# Altium PCB VisitCardPCB.PcbDoc (part 1 of 3)
Units mm, origin at the board's own origin, x right, y up, seen from the top; angles counter-clockwise.
Board outline 85 x 55 mm, 2 copper layers (Top, Bottom); 50 components, 47 nets, 148 pads, 42 vias.
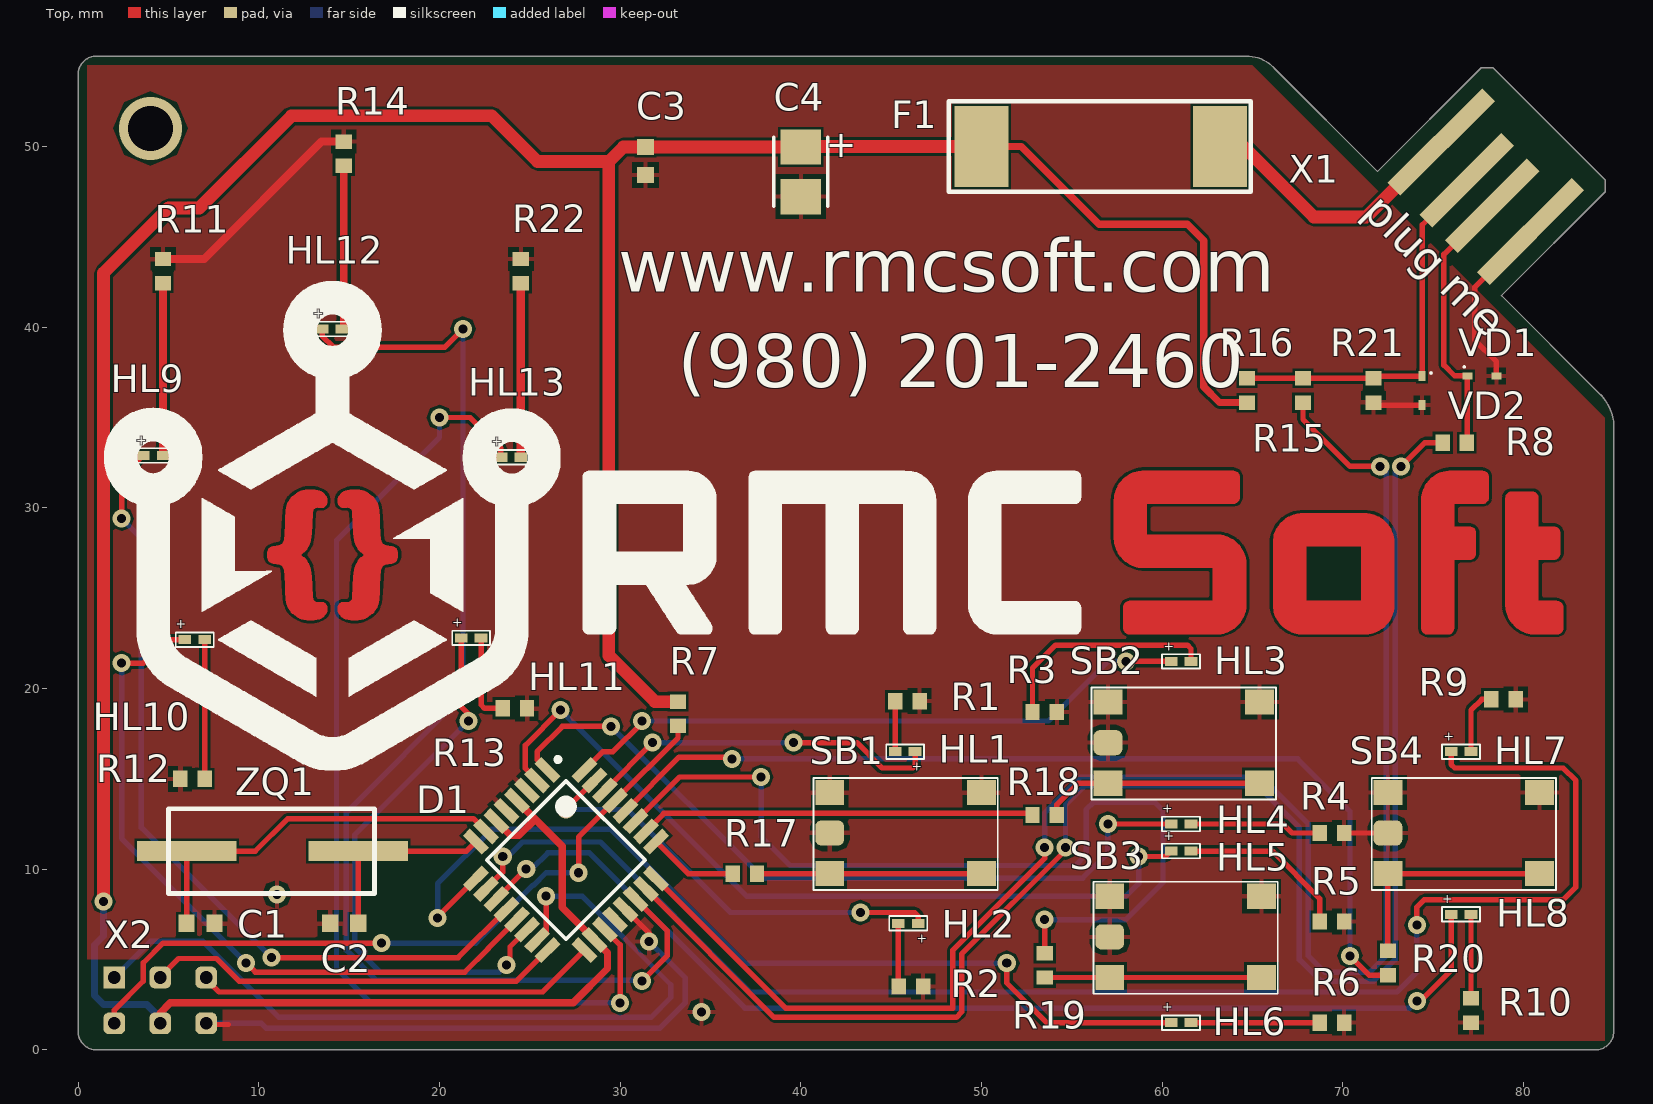
[diagram p0: Top view]
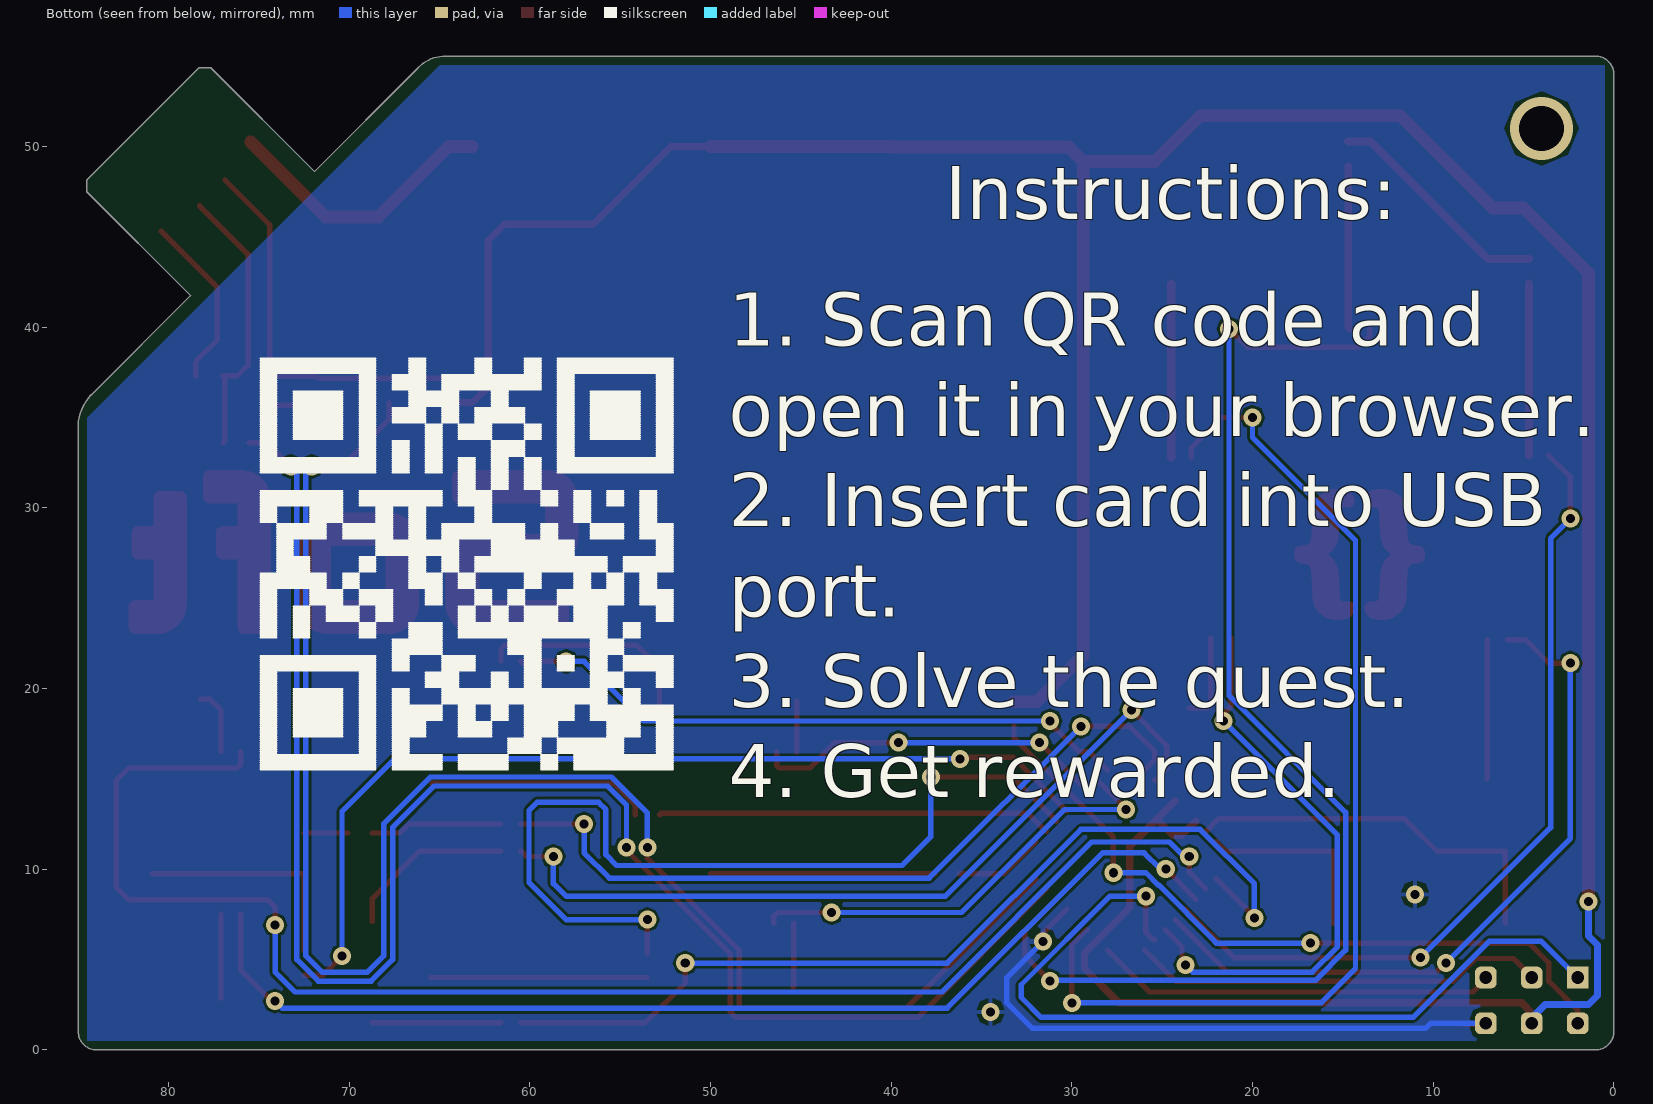
[diagram p1: Bottom view, seen from below]
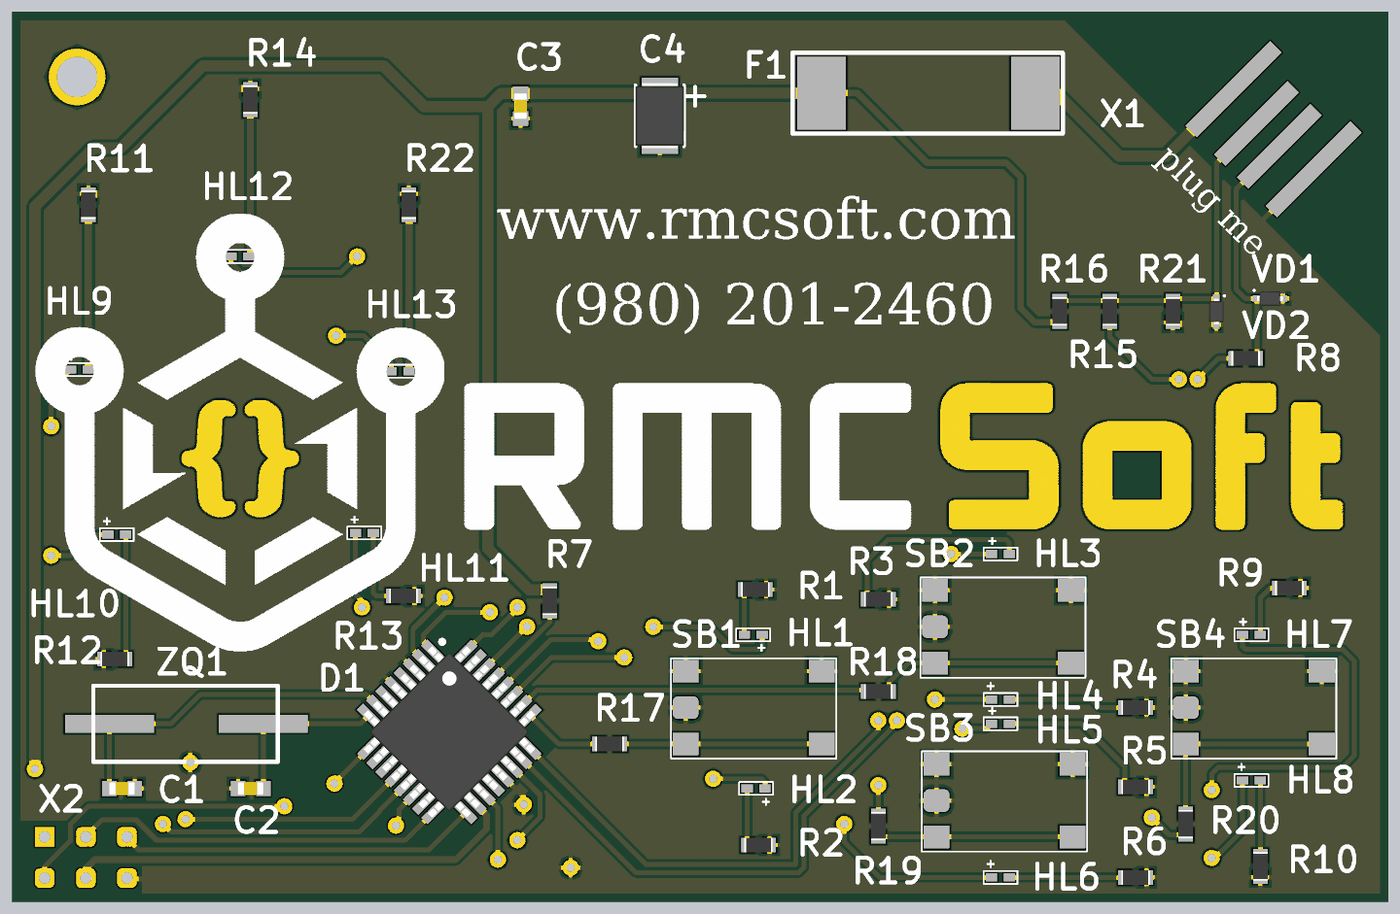
[diagram p4: 3D render of the assembled board from above, using the file's embedded part models]

## Layer stack, top to bottom
Top Solder: solder mask 0.0102, Solder Resist, Dk 3.5
Top: signal copper 0.0356
Dielectric 1: dielectric 0.32, FR-4, Dk 4.8
Bottom: signal copper 0.0356
Bottom Solder: solder mask 0.0102, Solder Resist, Dk 3.5

## Board outline
1,0 cw(c1,1) 0,1 0,54 cw(c1,54) 1,55 64.834,55 64.834,54.999 cw(c64.69,52.93) 66.263,54.282 66.268,54.282 71.93,48.62 77.67,54.36 78.32,54.36 84.53,48.15 84.53,47.5 78.78,41.75 78.79,41.75 84.176,36.364 cw(c82.216,34.326) 85.003,34.801 85,34.801 85,1 cw(c84,1) 84,0

## Design rules (kind name [scope] priority, off if disabled: settings)
Clearance [All] p1: gap=0.152 ignorepadtopadclearanceinfootprint=FALSE
DiffPairsRouting DiffPairsRouting_1 [InDifferentialPairClass('USB')] p1: maxlimit=0.25 minlimit=0.2 mostfreqgap=0.2 toplayer_minwidth=0.2 toplayer_maxwidth=0.35 toplayer_prefwidth=0.3 bottomlayer_minwidth=0.2 bottomlayer_maxwidth=0.35 bottomlayer_prefwidth=0.3 maxuncoupledlength=12.7
DiffPairsRouting [All] p2: maxlimit=0.254 minlimit=0.254 mostfreqgap=0.254 toplayer_minwidth=0.381 toplayer_maxwidth=0.381 toplayer_prefwidth=0.381 bottomlayer_minwidth=0.381 bottomlayer_maxwidth=0.381 bottomlayer_prefwidth=0.381 maxuncoupledlength=12.7
HoleSize [IsVia] p1: absolutevalues=TRUE maxlimit=0.5 minlimit=0.5 maxpercent=80.000 minpercent=20.000
HoleSize MinimumDrillHoleSize [All] p2: absolutevalues=TRUE maxlimit=2.54 minlimit=0.3 maxpercent=80.000 minpercent=20.000
MatchedLengths [InDifferentialPairClass('USB')] p1: tolerance=25.4 checknetsindiffpair=FALSE checkdiffpairvsdiffpair=TRUE checkxsignals=TRUE checkothers=TRUE
PolygonConnect [All] p1: connectstyle=Relief reliefconductorwidth=0.254 reliefentries=4 polygonreliefangle="90 Angle" airgapwidth=0.254
RoutingVias RoutingVias_1 [ViaDiameter = 3.5] p1: holewidth=2.5 width=3.5 viastyle="Through Hole" minholewidth=0.711 minwidth=1.27 maxholewidth=3 maxwidth=4
RoutingVias [All] p2: holewidth=0.5 width=1 viastyle="Through Hole" minholewidth=0.3 minwidth=0.7 maxholewidth=0.7 maxwidth=1.2
SilkToSilkClearance [All] p1: silktosilkclearance=0.152
SilkToSolderMaskClearance [IsPad] p1: minsilkscreentomaskgap=0.152 clearancetoexposedcopper=TRUE
SolderMaskExpansion [All] p1: expansion=0.102
Width +5V [InNet('+5V')] p1: maxlimit=1 minlimit=0.3 preferedwidth=0.7
Width [All] p2: maxlimit=0.45 minlimit=0.15 preferedwidth=0.3
26 further rules are at their usual default settings.

## Classes and differential pairs
differential pair class USB: 1RX 2RX
differential pair 1RX: +1RX_P -1RX_N
differential pair 2RX: +2RX_P -2RX_N

## Components (designator, comment, footprint, x,y, rotation, side; value= is the part's Value field where it differs from the comment)
C1 "Конденсатор22пФ" C0603 6.775,7 r180 top value=22пФ
C2 "Конденсатор22пФ" C0603 14.725,7 r0 top value=22пФ
C3 "Конденсатор100нФ" C0603 31.4,49.2 r90 top value=100нФ
C4 "Конденсатор 47мкФ" CaseB 40,48.6 r270 top value=47мкФ
D1 "МикросхемаAtmega8A-AU" A32 27,10.5 r315 top value=Atmega8A-AU
F1 "Fuse 0.4A" "Fuse 0.4A" 50,50 r0 top
HL1 "СветодиодKPHHS-1005MGCK" LED0402_GREEN 46.325,16.5 r180 top value=KPHHS-1005MGCK
HL2 "СветодиодKPHHS-1005SURCK" LED0402_RED 46.5,7 r180 top value=KPHHS-1005SURCK
HL3 "СветодиодKPHHS-1005MGCK" LED0402_GREEN 60.5,21.5 r0 top value=KPHHS-1005MGCK
HL4 "СветодиодKPHHS-1005SURCK" LED0402_RED 60.5,12.5 r0 top value=KPHHS-1005SURCK
HL5 "СветодиодKPHHS-1005MGCK" LED0402_GREEN 60.5,11 r0 top value=KPHHS-1005MGCK
HL6 "СветодиодKPHHS-1005SURCK" LED0402_RED 60.5,1.5 r0 top value=KPHHS-1005SURCK
HL7 "СветодиодKPHHS-1005MGCK" LED0402_GREEN 76,16.5 r0 top value=KPHHS-1005MGCK
HL8 "СветодиодKPHHS-1005SURCK" LED0402_RED 76,7.5 r0 top value=KPHHS-1005SURCK
HL9 "СветодиодKPHHS-1005MGCK" LED0402_GREEN 3.6,32.9 r0 top value=KPHHS-1005MGCK
HL10 "СветодиодKPHHS-1005SURCK" LED0402_RED 5.9,22.7 r0 top value=KPHHS-1005SURCK
HL11 "СветодиодKPHHS-1005SURCK" LED0402_RED 21.2,22.8 r0 top value=KPHHS-1005SURCK
HL12 "СветодиодKPHHS-1005SYCK" LED0402_YELLOW 13.5,39.9 r0 top value=KPHHS-1005SYCK
HL13 "СветодиодKPHHS-1005SECK" LED0402_ORANGE 23.4,32.8 r0 top value=KPHHS-1005SECK
R1 "200Ом" R0603 45.9,19.3 r0 top
R2 "200Ом" R0603 46.1,3.5 r0 top
R3 "200Ом" R0603 53.5,18.7 r0 top
R4 "200Ом" R0603 69.4,12 r0 top
R5 "200Ом" R0603 69.4,7.1 r0 top
R6 "200Ом" R0603 69.4,1.5 r0 top
R7 "10кОм" R0603 33.2,18.6 r90 top
R8 "68Ом" R0603 76.2,33.6 r0 top
R9 "200Ом" R0603 78.9,19.4 r0 top
R10 "200Ом" R0603 77.1,2.175 r270 top
R11 "200Ом" R0603 4.7,43.1 r90 top
R12 "200Ом" R0603 6.325,15 r180 top
R13 "200Ом" R0603 24.168,18.9 r0 top
R14 "200Ом" R0603 14.7,49.6 r90 top
R15 "68Ом" R0603 67.8,36.5 r90 top
R16 "2.2кОм" R0603 64.7,36.5 r270 top
R17 "330Ом" R0603 36.9,9.75 r0 top
R18 "330Ом" R0603 53.5,13 r0 top
R19 "330Ом" R0603 53.5,4.675 r270 top
R20 "330Ом" R0603 72.5,4.8 r90 top
R21 "4.7кОм" R0603 71.7,36.5 r90 top
R22 "200Ом" R0603 24.5,43.1 r90 top
SB1 "Family+Value" 1-1437565-6 50.8,14.95 r180 top value=1-1437565-6
SB2 "Family+Value" 1-1437565-6 66.2,19.95 r180 top value=1-1437565-6
SB3 "Family+Value" 1-1437565-6 66.3,9.2 r180 top value=1-1437565-6
SB4 "Family+Value" 1-1437565-6 81.7,14.95 r180 top value=1-1437565-6
VD1 "СтабилитронMM5Z3V6" SOD-523F 77.7,37.3 r0 top value=MM5Z3V6
VD2 "СтабилитронMM5Z3V6" SOD-523F 74.384,36.488 r270 top value=MM5Z3V6
X1 "Вилка USB" USB 71.879,48.588 r315 top value=USB
X2 "" SPI 2,4 r0 top
ZQ1 "РезонаторHC-49SM 16 Мгц" HC-49SM 5,11 r0 top value="HC-49SM 16 Мгц"

## Footprints (in the part's own frame and the unit in brackets; to place one, negate y for a bottom-side part, rotate by r counter-clockwise, add the part's x,y. Pads: shape width x height; smd on the part's side, far side on the other; paste and mask are expansions set on the pad)
1-1437565-6 [mm] "Button 1-1437565-6"
  rect 1.6x1.395 smd: 1(0.8,5.2) 2(9.2,5.2) 3(0.8,0.7) 4(9.2,0.7)
  rrect50% 1.6x1.395 smd: 5(9.2,2.95)
  silkscreen extent -0.1,-0.1 10.1,6.1, body extent 0.53,-0.1 9.48,6.05, height 3.1
A32 [mm] "TQFP, 32-Leads, Body 7,00x7,00mm, Pitch 0,80mm, IPC Medium Density"
  rect 1.5x0.55 smd: 1(-4.25,2.8) 2(-4.25,2) 3(-4.25,1.2) 4(-4.25,0.4) 5(-4.25,-0.4) 6(-4.25,-1.2) 7(-4.25,-2) 8(-4.25,-2.8) 17(4.25,-2.8) 18(4.25,-2) 19(4.25,-1.2) 20(4.25,-0.4) 21(4.25,0.4) 22(4.25,1.2) 23(4.25,2) 24(4.25,2.8)
  rect 0.55x1.5 smd: 9(-2.8,-4.25) 10(-2,-4.25) 11(-1.2,-4.25) 12(-0.4,-4.25) 13(0.4,-4.25) 14(1.2,-4.25) 15(2,-4.25) 16(2.8,-4.25) 25(2.8,4.25) 26(2,4.25) 27(1.2,4.25) 28(0.4,4.25) 29(-0.4,4.25) 30(-1.2,4.25) 31(-2,4.25) 32(-2.8,4.25)
  silkscreen extent -4.37,-3.1 3.1,3.75, body extent -4.5,-4.5 4.5,4.5, height 1.2
C0603 [mm] "Chip Capacitor, 2-Leads, Body 1,60x0,80mm, IPC Medium Density"
  rect 0.9x0.95 smd: 1(-0.775,0) 2(0.775,0)
  body extent -0.8,-0.4 0.8,0.4, height 0.9
CaseB [mm] "Molded Capacitor, 2-Leads, Body 3,50x2,80mm, IPC Medium Density"
  rect 1.95x2.25 smd: 1(-1.375,0) 2(1.375,0)
  silkscreen extent -1.9,-1.5 1.9,1.5, body extent -2.07,-1.5 2.07,1.5, height 2.1
"Fuse 0.4A" [mm] "SMD Fuse 0.4A"
  rect 3x4.5 smd: 1(0,0) 2(13.2,0)
  silkscreen extent -1.8,-2.5 14.9,2.5, body extent -1.7,-2.4 15,2.4, height 4.1
HC-49SM [mm] "Crystal, HC-49SM"
  rect 5.5x1.1 smd: 1(1,0) 2(10.5,0)
  silkscreen extent 0,-2.35 11.4,2.35, body extent -1.8,-2.5 13.15,2.5, height 4
LED0402_GREEN [mm] "LED Kingbright 0402"
  rect 0.7x0.5 smd: 1(0,0) 2(1.1,0)
  silkscreen extent -0.5,-0.4 1.6,0.4, body extent 0,-0.25 1.1,0.25, height 0.55
LED0402_ORANGE [mm] "LED Kingbright 0402"
  rect 0.7x0.5 smd: 1(0,0) 2(1.1,0)
  silkscreen extent -0.5,-0.4 1.6,0.4, body extent 0,-0.25 1.1,0.25, height 0.55
LED0402_RED [mm] "LED Kingbright 0402"
  rect 0.7x0.5 smd: 1(0,0) 2(1.1,0)
  silkscreen extent -0.5,-0.4 1.6,0.4, body extent 0,-0.25 1.1,0.25, height 0.55
LED0402_YELLOW [mm] "LED Kingbright 0402"
  rect 0.7x0.5 smd: 1(0,0) 2(1.1,0)
  silkscreen extent -0.5,-0.4 1.6,0.4, body extent 0,-0.25 1.1,0.25, height 0.55
R0603 [mm] "Chip Resistor, 2-Leads, Body 1,65x0,80mm, IPC Medium Density"
  rect 0.8x0.9 smd: 1(-0.675,0) 2(0.675,0)
  body extent -0.87,-0.45 0.87,0.45, height 0.55
SOD-523F [mm] "SODFL, 2-Leads, Body 0,80x1,60mm, IPC Medium Density"
  rect 0.55x0.4 smd: 1(-0.8,0) 2(0.8,0)
  silkscreen extent -1.02,0.45 -0.93,0.55, body extent -0.8,-0.45 0.8,0.45, height 0.7
SPI [mm] "SPI conntector for ATmega8A"
  rect 1.2x1.2 hole 0.7: 1(0,0)
  rrect50% 1.2x1.2 hole 0.7: 2(2.54,0) 3(5.08,0) 4(0,-2.54) 5(2.54,-2.54) 6(5.08,-2.54)
USB [mm] "USB"
  rect 1x7.41 smd: 1(1.35,3.7) 4(8.35,3.7)
  rect 1x6.41 smd: 2(3.85,3.2) 3(5.85,3.2)

## Part data
C1 C2: library part GRM1885C1H220JA01D, "Конденсатор керамический", Manufacturer=Murata, Supplier Part Number 1=490-1411-1-ND, Temperature=-55...+125, Tolerance=±5%, Voltage=50В, ComponentLink1Description=Datasheet, ComponentLink1URL="E:\YandexDisk\!Projects\Datasheet\Забугор\Murata\Capacitors ceramic.pdf", Family=Конденсатор, ManufacturerPartNumber=GRM1885C1H220JA01D, Supplier 1=Digi-Key, Корпус=C0603
C3: library part GRM1885C1HR10BD01D, "Конденсатор керамический", Manufacturer=Murata, Supplier Part Number 1=81-GRM1885C1HR10BD1D, Temperature=-55...+125, Tolerance=±5%, Voltage=50В, ComponentLink1Description=Datasheet, ComponentLink1URL="E:\YandexDisk\!Projects\Datasheet\Забугор\Murata\Capacitors ceramic.pdf", Family=Конденсатор, ManufacturerPartNumber=GRM1885C1HR10BD01D, Supplier 1=Mouser, Корпус=C0603
C4: library part TECAP47/10VB10, "Конденсатор танталовый", Manufacturer=TECAP, Temp=-55...+85, Tolerance=10%, ComponentLink1Description=Документация, ComponentLink1URL="E:\YandexDisk\!Projects\Datasheet\Забугор\Конденсаторы\Танталовые smd.pdf", Family=Конденсатор, ManufacturerPartNumber=TECAP47/10VB10, TU/GOST=АЖЯР.673546.004ТУ, Umax=6.3В, Корпус=CASEB
D1: library part Atmega8A-AU, "Микроконтроллер, 8 бит, 16 МГц, 8 кБайт FLASH, 1 кБайт SRAM", Manufacturer=Microchip\Atmel, Temperature=-40...+85, Voltage=5В, ComponentLink1Description=Datasheet, ComponentLink1URL=E:\YandexDisk\!Projects\Datasheet\Забугор\Atmel\Atmega8a.pdf, ComponentLink2Description=Site, ComponentLink2URL=https://www.microchip.com/wwwproducts/en/ATmega8A, Family=Микросхема, ManufacturerPartNumber=Atmega8A-AU, Корпус=32A
F1: library part 160016.0,4, "Предохранитель 400 мА", Current=400мА, Manufacturer=Siba, Power/Voltage=250В, Supplier Part Number 1=2132113, ComponentLink1Description=Datasheet, ComponentLink1URL=E:\YandexDisk\!Projects\Datasheet\Забугор\Siba\Fuse.pdf, Family=Предохранитель, ManufacturerPartNumber=160016.0,4, Supplier 1=Farnell
HL1 HL3 HL5 HL7 HL9: library part KPHHS-1005MGCK, "Светодиод, зеленый, SMD", Current=20мА, Manufacturer=Kingbright, Supplier Part Number 1=2449865, Voltage=2.1В, ComponentLink1Description=Datasheet, ComponentLink1URL="E:\YandexDisk\!Projects\Datasheet\Забугор\Kingbright\LED smd.pdf", Family=Светодиод, ManufacturerPartNumber=KPHHS-1005MGCK, Supplier 1=Farnell, Корпус=LED0402, Примечание=Зеленый
HL2 HL4 HL6 HL8 HL10 HL11: library part KPHHS-1005SURCK, "Светодиод, красный, SMD", Current=20мА, Manufacturer=Kingbright, Supplier Part Number 1=2449866, Voltage=2.1В, ComponentLink1Description=Datasheet, ComponentLink1URL=E:\YandexDisk\!Projects\Datasheet\Забугор\Kingbright\KPHHS-1005SURCK.pdf, Family=Светодиод, ManufacturerPartNumber=KPHHS-1005SURCK, Supplier 1=Farnell, Корпус=LED0402, Примечание=Красный
HL12: library part KPHHS-1005SYCK, "Светодиод, жёлтый, SMD", Current=20мА, Manufacturer=Kingbright, Supplier Part Number 1=466-3649, Voltage=2.1В, ComponentLink1Description=Datasheet, ComponentLink1URL=E:\YandexDisk\!Projects\Datasheet\Забугор\Kingbright\KPHHS-1005SURCK.pdf, Family=Светодиод, ManufacturerPartNumber=KPHHS-1005SYCK, Supplier 1=RSComponents, Корпус=LED0402, Примечание=Жёлтый
HL13: library part KPHHS-1005SECK, "Светодиод, оранжевый, SMD", Current=20мА, Manufacturer=Kingbright, Supplier Part Number 1=4663627, Voltage=2.1В, ComponentLink1Description=Datasheet, ComponentLink1URL=E:\YandexDisk\!Projects\Datasheet\Забугор\Kingbright\KPHHS-1005SURCK.pdf, Family=Светодиод, ManufacturerPartNumber=KPHHS-1005SECK, Supplier 1=RSComponents, Корпус=LED0402, Примечание=Оранжевый
R1 R2 R3 R4 R5 R6 R9 R10 R11 R12 R13 R14 R22: library part CRCW0603200RJNEA, "Резистор", Manufacturer=Vishay, Power/Voltage=0.1Вт, Supplier Part Number 1=541-10KGCT-ND, Temperature=-55...+155, Tolerance=5%, Voltage=75В, ComponentLink1Description=Datasheet, ComponentLink1URL="E:\YandexDisk\!Projects\Datasheet\Забугор\Vishay\Резисторы CRCW.pdf", Family=Резистор, ManufacturerPartNumber=CRCW0603200RJNEA, Part Number=CRCW0603200RJNEA, Supplier 1=Digi-Key, Корпус=R0603
R7: library part CRCW060310K0JNEA, "Резистор", Manufacturer=Vishay, ManufacturerPartNumber=CRCW06034K7JNEA, Power/Voltage=0.1Вт, Supplier Part Number 1=541-10KGCT-ND, Temperature=-55...+155, Tolerance=5%, Voltage=75В, ComponentLink1Description=Datasheet, ComponentLink1URL="E:\YandexDisk\!Projects\Datasheet\Забугор\Vishay\Резисторы CRCW.pdf", Family=Резистор, Part Number=CRCW060310K0JNEA, Supplier 1=Digi-Key, Корпус=R0603
R8 R15: library part CRCW060368R0JNEA, "Резистор", Manufacturer=Vishay, Power/Voltage=0.1Вт, Supplier Part Number 1=541-10KGCT-ND, Temperature=-55...+155, Tolerance=5%, Voltage=75В, ComponentLink1Description=Datasheet, ComponentLink1URL="E:\YandexDisk\!Projects\Datasheet\Забугор\Vishay\Резисторы CRCW.pdf", Family=Резистор, ManufacturerPartNumber=CRCW060368R0JNEA, Part Number=CRCW060368R0JNEA, Supplier 1=Digi-Key, Корпус=R0603
R16: library part CRCW06032K20JNEA, "Резистор", Manufacturer=Vishay, ManufacturerPartNumber=CRCW06034K70JNEA, Power/Voltage=0.1Вт, Supplier Part Number 1=541-2.2KGTR-ND, Temperature=-55...+155, Tolerance=5%, Voltage=75В, ComponentLink1Description=Datasheet, ComponentLink1URL="E:\YandexDisk\!Projects\Datasheet\Забугор\Vishay\Резисторы CRCW.pdf", Family=Резистор, Part Number=CRCW06034K70JNEA, Supplier 1=Digi-Key, Корпус=R0603
R17 R18 R19 R20: library part CRCW0603330RJNEA, "Резистор", Manufacturer=Vishay, Power/Voltage=0.1Вт, Temperature=-55...+155, Tolerance=5%, Voltage=75В, ComponentLink1Description=Datasheet, ComponentLink1URL="E:\YandexDisk\!Projects\Datasheet\Забугор\Vishay\Резисторы CRCW.pdf", Family=Резистор, ManufacturerPartNumber=CRCW0603330RJNEA, Part Number=CRCW0603330RJNEA, Supplier 2=Farnell, Supplier Part Number 2=1692522, Корпус=R0603
R21: library part CRCW06034K70JNEA, "Резистор", Manufacturer=Vishay, Power/Voltage=0.1Вт, Temperature=-55...+155, Tolerance=5%, Voltage=75В, ComponentLink1Description=Datasheet, ComponentLink1URL="E:\YandexDisk\!Projects\Datasheet\Забугор\Vishay\Резисторы CRCW.pdf", Family=Резистор, ManufacturerPartNumber=CRCW06034K70JNEA, Part Number=CRCW06034K70JNEA, Корпус=R0603
SB1 SB2 SB3 SB4: library part 1-1437565-6, "Button", Manufacturer="TE Connectivity", Part Number=FSM1LP, Supplier Part Number 1=450-1132-ND, Temperature=-35...+85, ComponentLink1Description=Datasheet, ComponentLink1URL="E:\YandexDisk\!Projects\Datasheet\Забугор\TE Connectivity\Buttons.pdf", Family=Кнопка, Supplier 1=Digi-Key
VD1 VD2: library part MM5Z3V6, "Стабилитрон 3.6В", Manufacturer="ON Semiconductor/Fairchild", ManufacturerPartNumber=MM5Z3V6TR-ND, Power/Voltage=200мВт, Temperature=-55...+155, Tolerance=6%, ComponentLink1Description=Datasheet, ComponentLink1URL="E:\YandexDisk\!Projects\Datasheet\Забугор\Fairchild\Zener MM5.pdf", Family=Стабилитрон, Supplier 1=Digi-Key, Supplier Part Number 1=MM5Z3V6TR-ND
X1: library part USB_pcb, "Вилка USB 2.0, печать", Family=Вилка, Примечание="USB вилка на печати"
X2: library part SPI_pcb, "Контакты на печати для программирования по SPI"
ZQ1: library part crystal_16Mhz_hc49sm, "Кварцевый резонатор, 16 МГц, 16пФ, 50ppm", Manufacturer=Multicomp, ManufacturerPartNumber=HC49SM-16-30-50-60-16-ATF, Temperature=-10...+60, ComponentLink1Description=Datasheet, ComponentLink1URL=E:\YandexDisk\!Projects\Datasheet\Забугор\Резонаторы\Multicomp.pdf, ComponentLink2Description="Чип и дип", ComponentLink2URL=https://www.chipdip.ru/product/16mhz-hc-49sm, Family=Резонатор, Корпус=HC-49/SM

## Via types
v1: diameter 1, hole 0.5, Top to Bottom, 41 vias
v2: diameter 3.5/3.5 (per signal layer), hole 2.5, Top to Bottom, 1 vias

## Nets (pads, with @x,y where several pads share a name; then routed paths per layer and width w, separated by ;. In a path a pad name is that pad's centre, name@x,y a point inside that pad or via, vN(x,y) a via of type N, cw(c..) or ccw(c..) an arc to the next point about the centre after c; other vN are vias at no path point)
1RX_N: R15.2 R16.1 R21.2 VD2.1 X1.2 | length 21.6
  Top w0.3: R16.1@64.7,37.175 R15.2@67.8,37.175 R21.2@71.7,37.175 71.813,37.288 VD2.1@74.384,37.288 74.4,37.304 74.4,45.664 X1.2@76.864,48.129
1RX_P: R8.2 VD1.1 X1.3 | length 15.3
  Top w0.3: VD1.1@76.9,37.3 76.9,33.675 R8.2@76.975,33.6 ; VD1.1@77,37.3 76.2,37.3 75.6,37.9 75.6,44.036 X1.3@78.278,46.714
2RX_N: D1.24 R15.1 | length 94.7
  Top w0.3: D1.24@31.985,9.475 39.16,2.3 48.4,2.3 48.4,5.5 53.5,10.6 v1(53.5,11.2) ; R15.1@67.8,35.825 67.8,34.9 70.4,32.3 v1(72.074,32.3)
  Bottom w0.3: v1(53.5,11.2) 53.5,13.107 55.493,15.1 65.507,15.1 68.1,12.507 68.1,5.2 69,4.3 71.5,4.3 72.4,5.2 72.4,32 72.1,32.3 v1(72.074,32.3)
2RX_P: D1.23 R8.1 | length 92.6
  Top w0.3: D1.23@31.419,8.909 38.528,1.8 48.607,1.8 48.9,2.093 48.9,5.293 54.652,11.045 v1(54.652,11.2) ; v1(73.226,32.3) 74.526,33.6 R8.1@75.525,33.6
  Bottom w0.3: v1(54.652,11.2) 54.652,13.552 55.7,14.6 65.3,14.6 67.6,12.3 67.6,4.993 68.793,3.8 71.707,3.8 72.9,4.993 72.9,32 73.2,32.3 v1(73.226,32.3)
+5V: C3.2 C4.1 D1.4 D1.6 D1.18 F1.1 R7.2 R16.2 X2.5 | length 196.4
  Top w0.4: X2.5@4.54,1.46 4.54,2.04 5.1,2.6 27.4,2.6 29.3,4.5 29.3,5.372 D1.18@28.591,6.081 26.8,7.872 26.8,11.266 25.3,12.766 ; D1.6@23.146,12.657 23.146,12.654 23.934,11.866 24.4,11.866 25.3,12.766 ; D1.4@24.278,13.788 25.3,12.766 ; F1.1@50,50 52.2,50 56.5,45.7 61.4,45.7 62.3,44.8 62.3,36.7 63.175,35.825 R16.2@64.7,35.825
  Top w0.7: v1(1.398,8.198) 1.398,42.998 5,46.6 6.7,46.6 11.8,51.7 22.9,51.7 25.425,49.175 29.375,49.175 ; R7.2@33.2,19.275 31.925,19.275 29.375,21.825 29.375,49.175 ; F1.1@50,50 40.025,50 C4.1@40,49.975 C3.2@31.4,49.975 30.175,49.975 29.375,49.175
  Bottom w0.4: v1(1.398,8.198) 1.398,6.298 0.898,5.798 0.898,3.002 1.4,2.5 3.8,2.5 4.54,1.76 X2.5@4.54,1.46
Button1: D1.25 R17.1 | length 5
  Top w0.3: D1.25@31.985,11.525 33.76,9.75 R17.1@36.225,9.75
Button2: D1.26 R18.1 | length 21.9
  Top w0.3: D1.26@31.419,12.091 32.414,13.086 52.739,13.086 R18.1@52.825,13
Button3: D1.27 R19.1 | length 50.5
  Top w0.3: D1.27@30.854,12.657 33.297,15.1 v1(37.8,15.1) ; R19.1@53.5,5.35 v1(53.5,7.2)
  Bottom w0.3: v1(37.8,15.1) 37.8,11.8 39.4,10.2 55.2,10.2 55.8,10.8 55.8,13.3 56.2,13.7 59.6,13.7 60.05,13.25 60.05,9.25 58,7.2 v1(53.5,7.2)
Button4: D1.28 R20.1 | length 53.2
  Top w0.3: D1.28@30.288,13.222 33.266,16.2 36.2,16.2 v1(36.2,16.1) ; v1(70.4,5.2) 71.475,4.125 R20.1@72.5,4.125
  Bottom w0.3: v1(36.2,16.1) 67.5,16.1 70.4,13.2 v1(70.4,5.2)
GND: C1.1 C2.1 C3.1 C4.2 D1.3 D1.5 D1.21 R1.2 R2.2 R3.2 R4.2 R5.2 R6.2 R9.2 R10.2 R11.2 R12.2 R13.2 R14.2 R21.1 R22.2 SB1.3 SB1.4 SB1.5 SB2.3 SB2.4 SB2.5 SB3.3 SB3.4 SB3.5 SB4.3 SB4.4 SB4.5 VD1.2 VD2.2 X1.4 X2.6 | length 62.6
  Top w0.3: X2.6@7.08,1.46 7.14,1.4 8.3,1.4 ; D1.21@30.288,7.778 31.6,6.466 v1(31.6,6) ; R4.2@70.075,12 SB4.5@72.5,12 ; R21.1@71.7,35.825 71.837,35.688 VD2.2@74.384,35.688 ; VD1.2@78.5,37.3 78.5,38.1 77.3,39.3 77.3,42.201 X1.4@80.4,45.3
  Top w0.45: R11.2@4.7,43.775 6.975,43.775 13.475,50.275 R14.2@14.7,50.275
  Bottom w0.3: X2.6@7.08,1.46 10.14,1.46 10.4,1.2 32.2,1.2 33.6,2.6 33.6,4 v1(31.6,6)
  other v1: 34.5,2.1 11,8.6
LED1: D1.30 HL1.1 | length 19.7
  Top w0.3: D1.30@29.157,14.354 31.8,16.997 v1(31.8,17) ; v1(39.6,17) 43.1,17 44.5,15.6 46.2,15.6 46.325,15.725 HL1.1@46.325,16.5
  Bottom w0.3: v1(31.8,17) v1(39.6,17)
LED2: D1.31 HL2.1 | length 24.6
  Top w0.3: v1(27,13.3) 27,13.328 D1.31@28.591,14.919 ; v1(43.3,7.6) 46.3,7.6 46.5,7.4 HL2.1@46.5,7
  Bottom w0.3: v1(27,13.3) 30.4,13.3 36.1,7.6 v1(43.3,7.6)
LED3: D1.32 HL3.1 | length 35.1
  Top w0.3: D1.32@28.025,15.485 29.04,16.5 29.6,16.5 31.2,18.1 v1(31.2,18.2) ; v1(58,21.5) 60.3,21.5 60.4,21.4 HL3.1@60.5,21.5
  Bottom w0.3: v1(31.2,18.2) 53.7,18.2 57,21.5 v1(58,21.5)
LED4: D1.1 HL4.1 | length 42.6
  Top w0.3: D1.1@25.975,15.485 25.4,16.06 25.4,16.5 26.8,17.9 v1(29.5,17.9) ; v1(57,12.5) HL4.1@60.5,12.5
  Bottom w0.3: v1(29.5,17.9) 37.9,9.5 55.6,9.5 57,10.9 v1(57,12.5)
LED5: D1.2 HL5.1 | length 44.9
  Top w0.3: D1.2@25.409,14.919 24.75,15.578 24.75,16.85 v1(26.7,18.8) ; v1(58.7,10.7) 60.2,10.7 HL5.1@60.5,11
  Bottom w0.3: v1(26.7,18.8) 37,8.5 58,8.5 58.7,9.2 v1(58.7,10.7)
LED6: D1.9 HL6.1 | length 51.9
  Top w0.3: v1(19.9,7.3) 19.9,7.36 D1.9@22.015,9.475 ; v1(51.4,4.8) 51.4,3.7 53.6,1.5 HL6.1@60.5,1.5
  Bottom w0.3: v1(19.9,7.3) 19.9,9.2 22.9,12.2 29.5,12.2 36.9,4.8 v1(51.4,4.8)
LED7: D1.10 HL7.1 | length 83.9
  Top w0.3: D1.10@22.581,8.909 23.5,9.828 v1(23.5,10.7) v1@23.635,10.7 ; v1(74.1,6.9) 74.1,7.9 74.5,8.3 82.2,8.3 82.9,9 82.9,14.9 82.2,15.6 76.2,15.6 76,15.8 HL7.1@76,16.5
  Bottom w0.3: v1(23.5,10.7) 23.8,10.7 24.6,11.5 28.9,11.5 37.2,3.2 73,3.2 74.1,4.3 v1(74.1,6.9)
LED8: D1.11 HL8.1 | length 61.4
  Top w0.3: D1.11@23.146,8.343 24.8,9.997 v1(24.8,10) ; v1(74.1,2.7) 74.3,2.7 76,4.4 HL8.1@76,7.5
  Bottom w0.3: v1(24.8,10) 25.1,10 26,10.9 28.3,10.9 36.9,2.3 73.7,2.3 v1(74.1,2.7)
LED9: D1.12 HL9.1 | length 45.9
  Top w0.3: v1(2.4,29.4) 2.4,31.7 HL9.1@3.6,32.9 ; v1(10.7,5.1) 16.465,5.1 16.468,5.098 17.132,5.098 17.135,5.1 21.034,5.1 D1.12@23.712,7.778
  Bottom w0.3: v1(2.4,29.4) 3.5,28.3 3.5,12.3 v1(10.7,5.1)
LED10: D1.13 HL10.1 | length 39.9
  Top w0.3: v1(2.4,21.4) 3.6,21.4 4.9,22.7 HL10.1@5.9,22.7 ; v1(9.3,4.8) 9.802,4.298 21.398,4.298 22.7,5.6 22.7,5.634 D1.13@24.278,7.212
  Bottom w0.3: v1(2.4,21.4) 2.4,11.7 v1(9.3,4.8)
LED11: D1.14 HL11.1 | length 31.4
  Top w0.3: HL11.1@21.2,22.8 21.2,19 21.6,18.6 v1(21.6,18.2) ; v1(23.7,4.7) 23.9,4.9 23.9,5.703 D1.14@24.843,6.646
  Bottom w0.3: v1(21.6,18.2) 15.3,11.9 15.3,5.7 16.7,4.3 23.3,4.3 v1(23.7,4.7)
LED12: D1.22 HL12.1 | length 68.8
  Top w0.3: HL12.1@13.5,39.9 13.5,39.525 14.125,38.9 20.3,38.9 v1(21.3,39.9) ; D1.22@30.854,8.343 32.6,6.597 32.6,5.2 v1(31.2,3.8)
  Bottom w0.3: v1(21.3,39.9) 21.3,19.6 14.848,13.148 14.848,5.513 16.513,3.848 31.152,3.848 v1(31.2,3.8)
LED13: D1.19 HL13.1 | length 58.3
  Top w0.3: v1(20,35) 21.7,35 23.4,33.3 HL13.1@23.4,32.8 ; D1.19@29.157,6.646 30,5.803 v1(30,2.6)
  Bottom w0.3: v1(20,35) 20,33.9 14.3,28.2 14.3,4.5 16.2,2.6 v1(30,2.6)
MISO: D1.16 X2.2 | length 23.1
  Top w0.3: X2.2@4.5,4 5.552,5.052 7.656,5.052 8.908,3.8 24.26,3.8 D1.16@25.975,5.515
MOSI: D1.15 X2.1 | length 46.1
  Top w0.3: D1.15@25.409,6.081 25.481,6.081 25.9,6.5 v1(25.9,8.5)
  Bottom w0.3: X2.1@2,4 4,6 6.9,6 11.102,1.798 31.698,1.798 32.8,2.9 32.8,3.6 27.9,8.5 v1(25.9,8.5)
NetF1_2: F1.2 X1.1 | length 15.6
  Top w0.7: F1.2@63.2,50 64.5,50 68.4,46.1 71.3,46.1 X1.1@75.45,50.25
NetHL1_2: HL1.2 R1.1 | length 2.8
  Top w0.3: HL1.2@45.225,16.5 R1.1@45.225,19.3
NetHL2_2: HL2.2 R2.1 | length 3.5
  Top w0.3: HL2.2@45.4,7 45.4,3.525 R2.1@45.425,3.5
NetHL3_2: HL3.2 R3.1 | length 12.5
  Top w0.3: R3.1@52.825,18.7 52.825,21.125 54.1,22.4 61.4,22.4 61.6,22.2 HL3.2@61.6,21.5
NetHL4_2: HL4.2 R4.1 | length 7.3
  Top w0.3: HL4.2@61.6,12.5 66.7,12.5 67.2,12 R4.1@68.725,12
NetHL5_2: HL5.2 R5.1 | length 9.5
  Top w0.3: HL5.2@61.6,11 66.1,11 68.725,8.375 R5.1@68.725,7.1
NetHL6_2: HL6.2 R6.1 | length 7.1
  Top w0.3: HL6.2@61.6,1.5 R6.1@68.725,1.5
NetHL7_2: HL7.2 R9.1 | length 3.7
  Top w0.3: HL7.2@77.1,16.5 77.1,18.8 77.7,19.4 R9.1@78.225,19.4
NetHL8_2: HL8.2 R10.1 | length 4.6
  Top w0.3: R10.1@77.1,2.85 HL8.2@77.1,7.5
NetHL9_2: HL9.2 R11.1 | length 9.5
  Top w0.45: HL9.2@4.7,32.9 R11.1@4.7,42.425
NetHL10_2: HL10.2 R12.1 | length 7.7
  Top w0.3: R12.1@7,15 HL10.2@7,22.7
NetHL11_2: HL11.2 R13.1 | length 5
  Top w0.3: HL11.2@22.3,22.8 22.3,19.1 22.5,18.9 R13.1@23.493,18.9
NetHL12_2: HL12.2 R14.1 | length 9.1
  Top w0.4: HL12.2@14.6,39.9 14.7,40 R14.1@14.7,48.925
NetHL13_2: HL13.2 R22.1 | length 9.6
  Top w0.45: HL13.2@24.5,32.8 R22.1@24.5,42.425
NetR17_2: R17.2 SB1.1 SB1.2 | length 12.4
  Top w0.3: R17.2@37.575,9.75 SB1.2@41.6,9.75 SB1.1@50,9.75
NetR18_2: R18.2 SB2.1 SB2.2 | length 12.3
  Top w0.3: R18.2@54.175,13 54.175,13.575 55.35,14.75 SB2.2@57,14.75 SB2.1@65.4,14.75
NetR19_2: R19.2 SB3.1 SB3.2 | length 12
  Top w0.3: R19.2@53.5,4 SB3.2@57.1,4 SB3.1@65.5,4
NetR20_2: R20.2 SB4.1 SB4.2 | length 12.7
  Top w0.3: R20.2@72.5,5.475 SB4.2@72.5,9.75 SB4.1@80.9,9.75
Reset: D1.29 R7.1 X2.4 | length 40.1
  Top w0.3: X2.4@2,2 2,2.2 3.6,3.8 3.6,4.808 4.694,5.902 16.798,5.902 v1(16.8,5.9) ; v1(27.7,9.8) 27.7,11.766 D1.29@29.722,13.788 33.2,17.265 R7.1@33.2,17.925
  Bottom w0.3: v1(16.8,5.9) 22,5.9 22.063,5.963 22.063,5.988 25.187,9.113 25.2,9.1 25.9,9.8 v1(27.7,9.8)
SCK: D1.17 X2.3 | length 22.3
  Top w0.3: X2.3@7,4 7.8,3.2 25.71,3.2 D1.17@28.025,5.515
Xtal1: C2.2 D1.8 ZQ1.2 | length 10.7
  Top w0.3: C2.2@15.5,7 ZQ1.2@15.5,11 21.49,11 D1.8@22.015,11.525
Xtal2: C1.2 D1.7 ZQ1.1 | length 21.6
  Top w0.3: C1.2@6,7 ZQ1.1@6,11 9.8,11 11.6,12.8 21.872,12.8 D1.7@22.581,12.091
pads on no net: D1.20
copper on no net: | length 5499.8